# Altium PCB DAC.PcbDoc
Units mm, origin at the board's own origin, x right, y up, seen from the top; angles counter-clockwise.
Board outline 28.82 x 19.05 mm, 2 copper layers (Top Layer, Bottom Layer), stack 1.57 mm thick; 6 components, 6 nets, 24 pads, 3 vias.
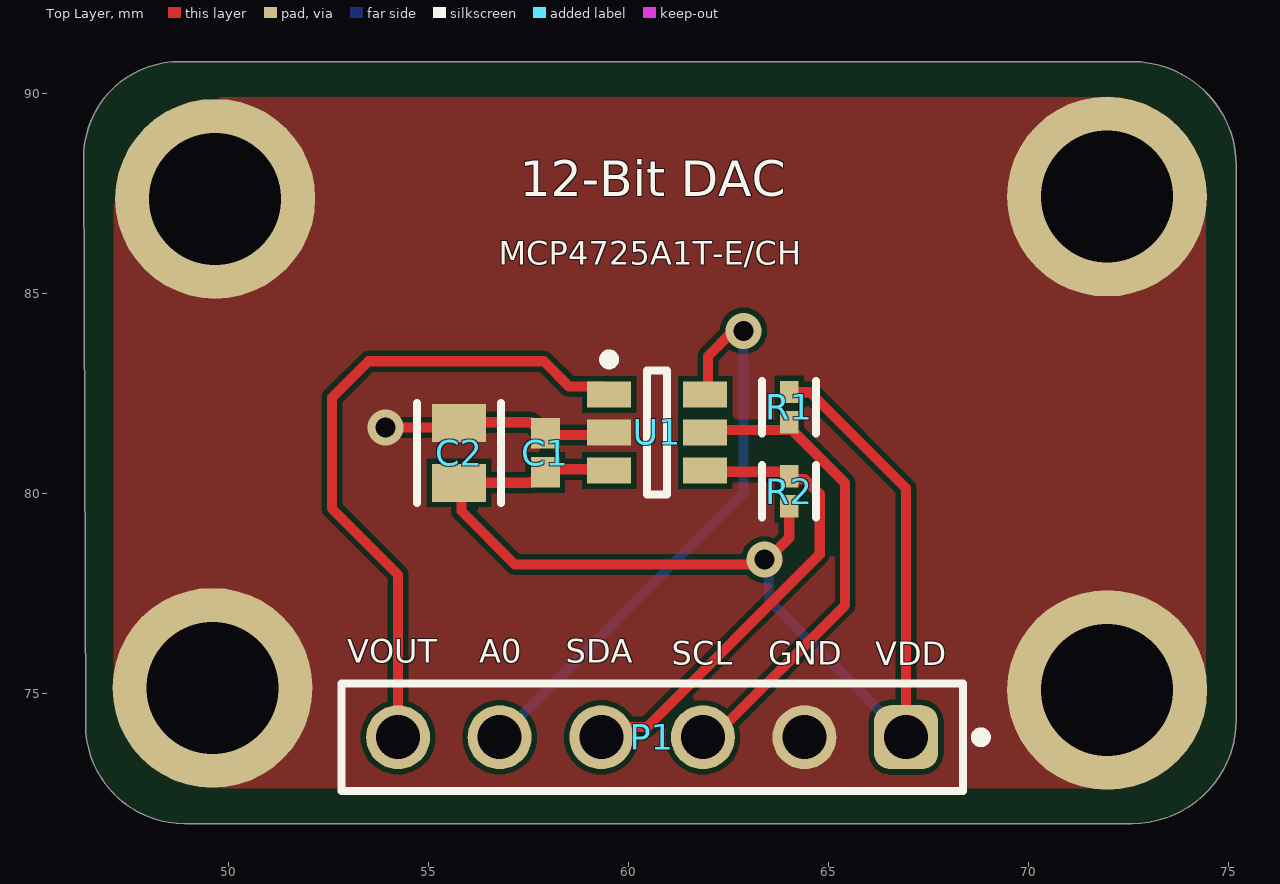
[diagram p0: Top Layer view]
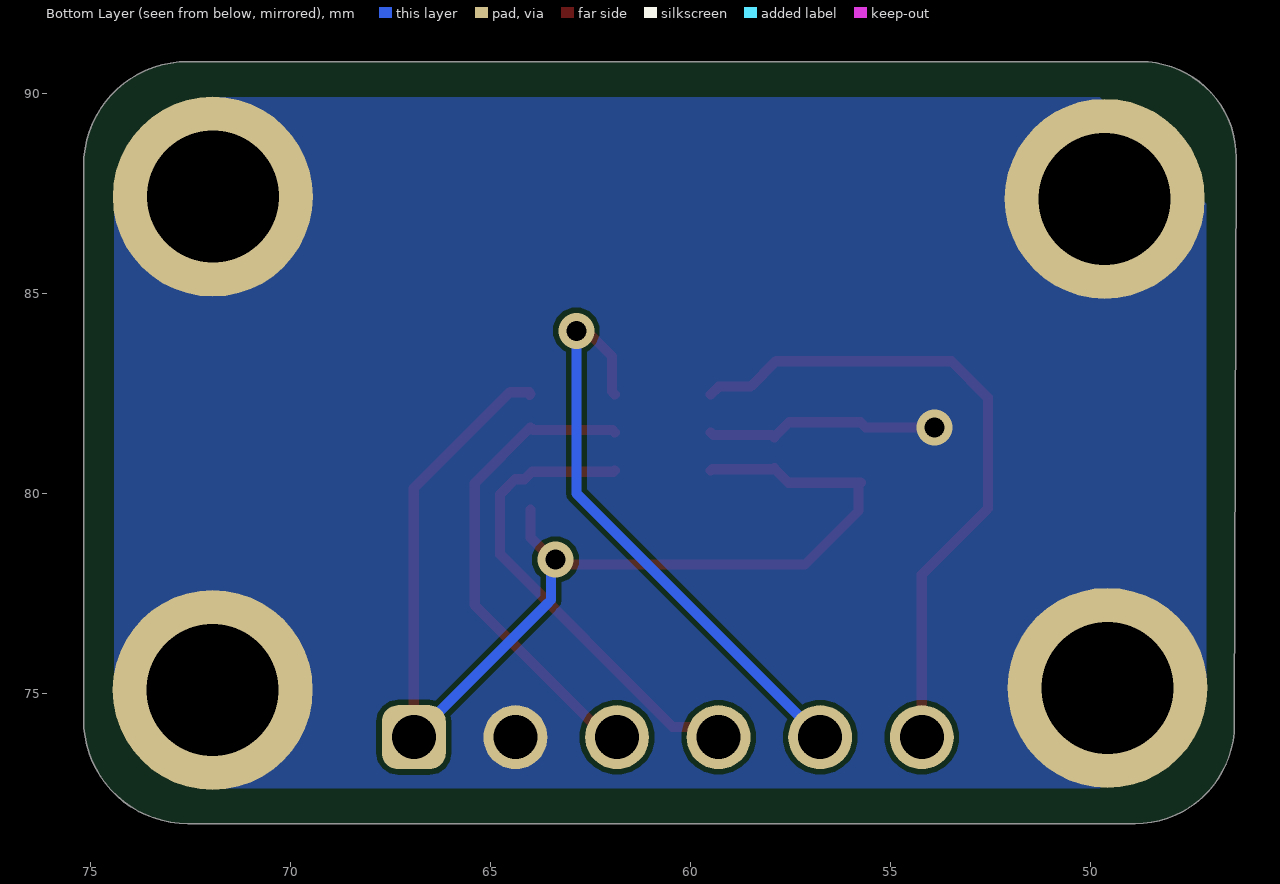
[diagram p1: Bottom Layer view, seen from below]
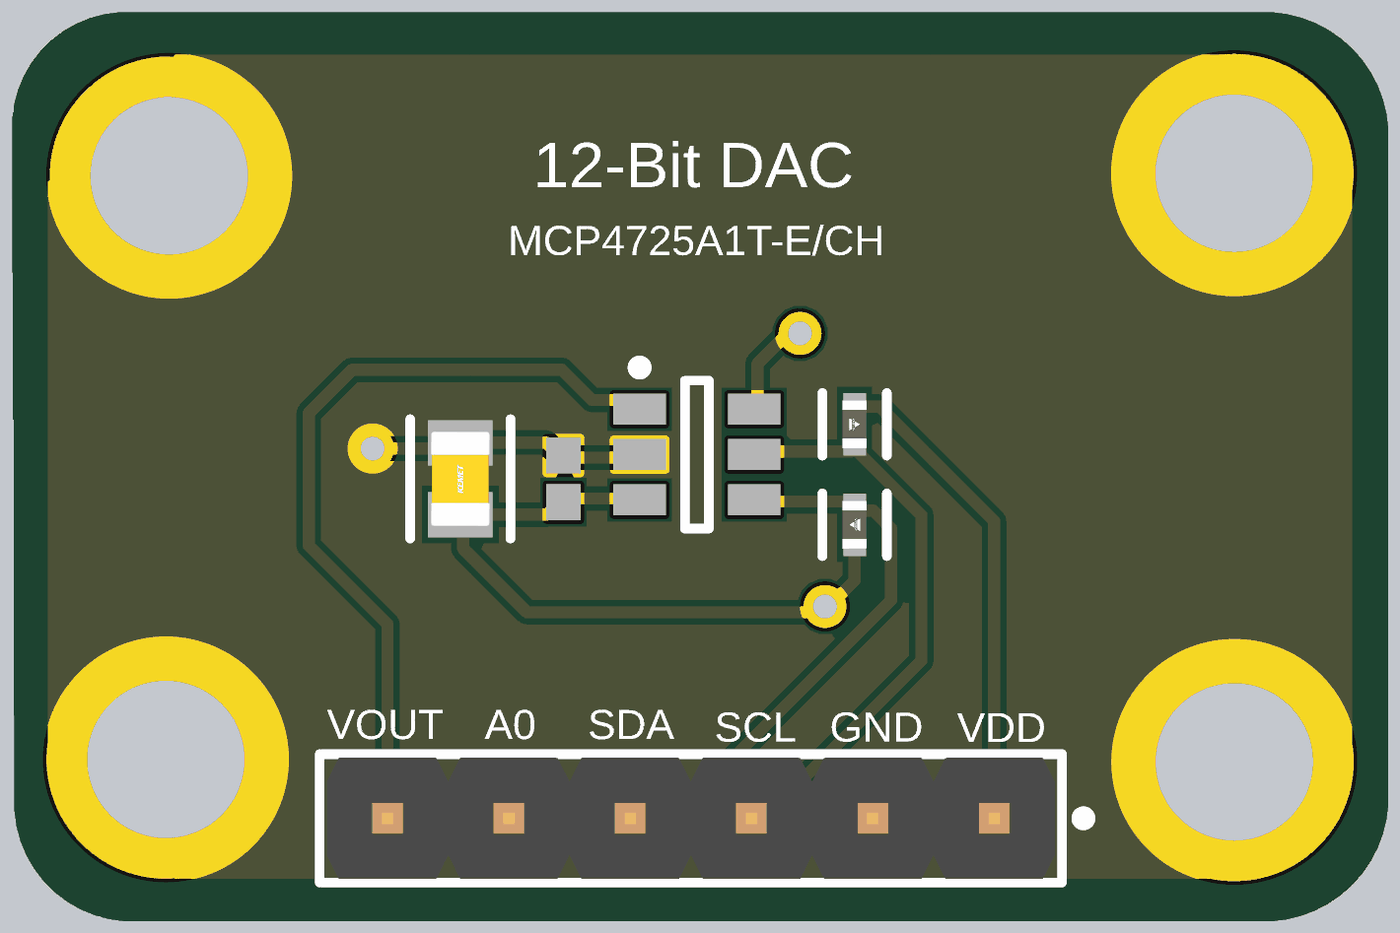
[diagram p2: 3D render of the assembled board from above, using the file's embedded part models]

## Layer stack, top to bottom
Top Solder: solder mask 0.0127, Solder Resist, Dk 3.8
Top Layer: signal copper 0.035
Dielectric: core 1.5, FR-4, Dk 4.5
Bottom Layer: signal copper 0.035
Bottom Solder: solder mask 0.0127, Solder Resist, Dk 3.8

## Board outline
46.415,74.235 46.368,88.405 cw(c48.768,88.405) 48.768,90.805 72.582,90.805 cw(c72.582,88.203) 75.184,88.203 75.184,74.422 75.184,74.357 cw(c72.582,74.357) 72.582,71.755 72.517,71.755 48.895,71.755 cw(c48.895,74.235)

## Design rules (kind name [scope] priority, off if disabled: settings)
BoardOutlineClearance [All] p1: gap=0.2 ignorepadtopadclearanceinfootprint=FALSE
Clearance [All] p1: gap=0.127 ignorepadtopadclearanceinfootprint=FALSE except(0.25: Arc-Hole Track-Hole SMDPad-Hole THPad-Hole Via-Hole Fill-Hole Poly-Hole Region-Hole Text-Hole)
ComponentClearance [All] p1: gap=0.127 collisioncheckmode=3 verticalgap=0.127 showdistances=TRUE
DiffPairsRouting [All] p1: maxlimit=0.254 minlimit=0.127 mostfreqgap=0.127 toplayer_minwidth=0.127 toplayer_maxwidth=25.4 toplayer_prefwidth=0.127 bottomlayer_minwidth=0.127 bottomlayer_maxwidth=25.4 bottomlayer_prefwidth=0.127 maxuncoupledlength=12.7
Height [All] p1: minheight=0 maxheight=1816.048 prefheight=12.7
HoleSize [All] p1: absolutevalues=TRUE maxlimit=6.3 minlimit=0.3 maxpercent=80.000 minpercent=20.000
HoleToHoleClearance [All] p1: gap=0.25 allowstackedmicrovias=FALSE
MinimumAnnularRing [All] p1: minimumring=0.076
MinimumSolderMaskSliver [All] p1: minsoldermaskwidth=0
PlaneClearance [All] p1: clearance=0.127
PlaneConnect PlaneConnectPowerPads [InPadClass('PowerPads')] p1: planeconnectstyle=Direct reliefexpansion=0.508 reliefentries=4 reliefconductorwidth=0.254 reliefairgap=0.254
PlaneConnect [All] p2: pad.planeconnectstyle=Relief pad.reliefexpansion=0.3 pad.reliefentries=4 pad.reliefconductorwidth=0.127 pad.reliefairgap=0.127 via.planeconnectstyle=Direct via.reliefexpansion=0.3 via.reliefentries=4 via.reliefconductorwidth=0.127 via.reliefairgap=0.127
PolygonConnect PolygonConnectPowerPads [All vs InNet('GND')] p1: connectstyle=Direct reliefconductorwidth=0.254 reliefentries=4 polygonreliefangle="90 Angle" airgapwidth=0.254
PolygonConnect [All] p2: thpad.connectstyle=Relief thpad.reliefconductorwidth=0.127 thpad.reliefentries=4 thpad.polygonreliefangle="90 Angle" thpad.airgapwidth=0.127 smdpad.connectstyle=Relief smdpad.reliefconductorwidth=0.127 smdpad.reliefentries=4 smdpad.polygonreliefangle="90 Angle" smdpad.airgapwidth=0.127 via.connectstyle=Direct via.reliefconductorwidth=0.127 via.reliefentries=4 via.polygonreliefangle="90 Angle" via.airgapwidth=0.127
RoutingVias [All] p1: holewidth=0.3 width=0.6 viastyle="Through Hole" minholewidth=0.3 minwidth=0.6 maxholewidth=0.6 maxwidth=6.6
SilkToSilkClearance [All] p1: silktosilkclearance=0
SilkToSolderMaskClearance [IsPad] p1: minsilkscreentomaskgap=0.127 clearancetoexposedcopper=TRUE
SolderMaskExpansion [All] p1: expansion=0.075 istentingtop=FALSE
SupplyNets "Schematic Supply Nets_1" [InNet('GND')] p1: voltage=0.000
SupplyNets "Schematic Supply Nets" [InNet('+3V3')] p2: voltage=0.000
Width [All] p1: maxlimit=25.4 minlimit=0.127 preferedwidth=0.254 minimp=50.000000 maximp=50.000000 favimp=50.000000
20 further rules are at their usual default settings.

## Components (designator, comment, footprint, x,y, rotation, side; value= is the part's Value field where it differs from the comment)
C1 "100nF" CAPC1050X55X23ML05T13 57.912,81.026 r270 top
C2 "10uF" FP-C0805C106J8RACAUTO-MFG 55.753,81.026 r90 top
P1 "61300611121" 61300611121 60.579,73.914 r180 top
R1 "10k" FP-CRCW0402-C-e3-IPC_C 64.008,82.169 r90 top
R2 "10k" FP-CRCW0402-C-e3-IPC_C 64.008,80.064 r270 top
U1 "MCP4725A1T-E/CH" SOT-23-CH6_N 60.706,81.534 r0 top

## Footprints (in the part's own frame and the unit in brackets; to place one, negate y for a bottom-side part, rotate by r counter-clockwise, add the part's x,y. Pads: shape width x height; smd on the part's side, far side on the other; paste and mask are expansions set on the pad)
61300611121 [mm] "Pin Header, pitch 2.54 mm, THT, Vertical, single row, 6p"
  rrect50% 1.6x1.6 hole 1.1: 1(-6.35,0)
  round 1.6 hole 1.1: 2(-3.81,0) 3(-1.27,0) 4(1.27,0) 5(3.81,0) 6(6.35,0)
  silkscreen extent -8.34,-1.35 7.77,1.35, body extent -7.62,-1.27 7.62,1.27, height 8.57
CAPC1050X55X23ML05T13 [mm] "Chip Capacitor, 2-Leads, Body 1.05x0.55mm, IPC Low Density"
  rect 0.76x0.72 smd: 1(-0.49,0) 2(0.49,0)
  body extent -0.53,-0.28 0.53,0.27, height 0.55
FP-C0805C106J8RACAUTO-MFG [mm]
  rect 0.95x1.35 smd paste+0 mask+0: 1(-0.75,0) 2(0.75,0)
  silkscreen extent -1.25,-1.05 1.25,1.05, body extent -1.4,-0.85 1.4,0.85, height 0.25
FP-CRCW0402-C-e3-IPC_C [mm]
  rect 0.56x0.472 smd paste+0 mask+0: 1(-0.376,0) 2(0.376,0)
  silkscreen extent -0.66,-0.67 0.66,0.67, body extent -0.76,-0.38 0.76,0.38, height 0.25
SOT-23-CH6_N [mm] "SOT23, 6-Leads, Body 2.9x1.7mm, Pitch 0.95mm, Lead Span 2.8mm, IPC Medium Density"
  rect 1.1x0.65 smd: 1(-1.2,0.95) 2(-1.2,0) 3(-1.2,-0.95) 4(1.2,-0.95) 5(1.2,0) 6(1.2,0.95)
  silkscreen extent -1.32,-1.55 0.25,1.95, body extent -0.9,-1.55 0.9,1.55, height 1.45

## Part data
C1: library part CMP-2000-05439-1, "Chip Capacitor, 100 nF, +/- 10%, 16 V, -55 to 125 degC, 0402 (1005 Metric), RoHS, Tape and Reel", Capacitance=100000pF, Case Size/Dimension=0402, Dielectric=X7R, Manufacturer="Samsung Electro-Mechanics", Rated Voltage=16V, Tolerance (%)=±10%, Datasheet URL=https://datasheet.ciiva.com/29198/458718-da-01-en-vs-kondensator-0402-29198423.pdf, Datasheet Version=Nov-10, Manufacturer URL=http://www.samsungsem.com/global/index.jsp
C2: library part CMP-03020-034708-1, "CAP CER 10UF 10V X7R 0805", Case Code (Imperial)=0805, Case Code (Metric)=2012, Max Operating Temperature=125°C, Min Operating Temperature=-55°C, Ratings=AEC-Q200, Tolerance=5%, Voltage Rating=10V, Capacitance=10uF, Case/Package=0805, Mount="Surface Mount", Packaging="Tape and Reel", RoHS Compliant=Yes
P1: library part CMP-1502-01070-3, Color=Black, Contact Resistance=20mΩ, Current Rating=3A, Max Operating Temperature=105°C, Min Operating Temperature=-40°C, Operating Supply Voltage=250V, Connector Type="Male Pin", Contact Gender=Male, Contact Material=Copper, Contact Mating Length=5.9944mm, Contact Plating=Gold, Gender=Male, Height=8.89mm, Housing Material=PBT, Lead Free="Lead Free", Lead Pitch=2.54mm, Mount="Through Hole", NexarPartId=20084590, Number of Contacts=6, Number of Pins=6, Number of Positions=6, Number of Rows=1, Orientation=Vertical, Packaging=Bulk, Pitch=2.54mm, REACH SVHC=Unknown, RoHS=Compliant, Termination="Through Hole", Voltage Rating=250V
R1 R2: library part CMP-02407-012085-1, "RES 10K OHM 1% 1/16W 0402", Case/Package=Molded, Max Operating Temperature=155°C, Min Operating Temperature=-55°C, Power Rating=62.5mW, Resistance=10kR, Resistor Type="Thick Film", Temperature Coefficient=100ppm/°C, Tolerance=1%, Contact Plating=Tin, Lead Free="Lead Free", Length=1mm, Mount="Surface Mount", RoHS Compliant=Yes, Termination=Wraparound
U1: library part CMP-0188-00759-2, "12-Bit Digital-to-Analog Converter with EEPROM Memory in SOT-23-6, 6-Pin SOT-23, Extended Temperature, Tape and Reel", Code_IPC=SOT26A-6, ComponentLink1Description="Manufacturer URL", ComponentLink1URL=http://www.microchip.com/, ComponentLink2Description=Datasheet, ComponentLink2URL=http://ww1.microchip.com/downloads/en/DeviceDoc/22039d.pdf, ComponentLink3Description="Package Specification", ComponentLink3URL=http://www.microchip.com/stellent/groups/techpub_sg/documents/packagingspec/en012702.pdf, DatasheetVersion="revD, Jun-2009", PackageDescription="6-Lead Plastic Small Outline Transistor (CH) [SOT-23]", PackageReference=SOT-23-CH6, PackageVersion="revBB, Aug-2009", RevisionNote="URLs added."

## Free pads (board coordinates)
  round 5 hole 3.3: 4(49.588,75.149) 4(49.657,87.376) 4(71.954,87.429) 4(71.958,75.096)

## Via types
v1: diameter 0.9, hole 0.5, Top Layer to Bottom Layer, 3 vias

## Nets (pads, with @x,y where several pads share a name; then routed paths per layer and width w, separated by ;. In a path a pad name is that pad's centre, name@x,y a point inside that pad or via, vN(x,y) a via of type N, cw(c..) or ccw(c..) an arc to the next point about the centre after c; other vN are vias at no path point)
+3V3: C1.2 C2.1 P1.1 R1.2 R2.2 U1.3 | length 30.3
  Top Layer w0.254: U1.3 59.474,80.616 57.944,80.616 57.912,80.647 57.912,80.626 57.562,80.276 C2.1 55.813,80.216 55.813,79.569 57.15,78.232 63.267,78.232 v1(63.387,78.352) ; v1@63.5,78.352 63.5,78.391 64.008,78.899 R2.2@64.008,79.611 ; R1.2@64.008,82.496 R1.2@64.037,82.467 ; R1.2@64.037,82.54 64.526,82.54 66.929,80.137 P1.1 ; P1.1@67.433,73.358 P1.1@67.437,73.354
  Bottom Layer w0.254: v1(63.387,78.352) 63.5,78.24 63.5,77.343 ; 63.578,77.265 P1.1
A0: P1.5 U1.6 | length 14.9
  Top Layer w0.254: U1.6 61.976,82.554 61.976,83.439 v1@62.611,84.074
  Bottom Layer w0.254: P1.5@56.506,73.651 62.865,80.01 v1(62.865,84.074)
GND: C1.1 C2.2 P1.2 pad.4 U1.2 | length 5.9
  Top Layer w0.254: v1(53.917,81.661) 55.638,81.661 55.765,81.788 57.55,81.788 57.912,81.426 57.912,81.405 57.977,81.469 59.441,81.469 U1.2
SCL: P1.3 R1.1 U1.5 | length 12.1
  Top Layer w0.254: P1.3 62.103,73.914 65.405,77.216 65.405,80.268 64.012,81.661 64.008,81.661 63.944,81.597 61.97,81.597 U1.5
SDA: P1.4 R2.1 U1.4 | length 12.2
  Top Layer w0.254: P1.4@59.429,73.399 59.429,73.67 59.931,74.172 60.456,74.172 64.77,78.486 64.77,79.993 64.4,80.362 64.164,80.362 63.975,80.551 61.939,80.551 U1.4
VOUT: P1.6 U1.1 | length 16.8
  Top Layer w0.254: P1.6 54.229,77.978 52.578,79.629 52.578,82.401 53.489,83.312 57.877,83.312 58.508,82.68 59.31,82.68 U1.1

## Polygon pours and split planes (outlines as drawn)
GND on Bottom Layer "GND_L02_P000" (solid, pour order 0): 49.784,89.916 47.117,87.249 47.117,75.311 49.784,72.644 72.009,72.644 74.422,75.057 74.422,87.503 72.009,89.916 71.628,89.916
GND on Top Layer "GND_L01_P001" (solid, pour order 1): 49.784,89.916 47.117,87.249 47.117,75.311 49.784,72.644 72.009,72.644 74.422,75.057 74.422,87.503 72.009,89.916 71.628,89.916

## Silkscreen, mask and mechanical layers (free items; w line width, h text height)
Top Overlay:
  text "12-Bit DAC" at 57.277,87.139 h1.52
  text "VOUT" at 52.96,75.576 h1
  text "A0" at 56.261,75.576 h1
  text "SDA" at 58.42,75.576 h1
  text "SCL" at 61.073,75.522 h1
  text "GND" at 63.486,75.522 h1
  text "VDD" at 66.154,75.511 h1
Mechanical 1:
  lines w0.254: 72.517,71.755 48.895,71.755 cw(c48.895,74.235) 46.415,74.235 46.368,88.405 cw(c48.768,88.405) 48.768,90.805 72.517,90.805 ; 72.582,71.755 ccw(c72.582,74.357) 75.184,74.357 ; 72.582,90.805 cw(c72.582,88.203) 75.184,88.203 75.184,74.422